# Altium PCB PCB_V2.PcbDoc
Units mm, origin at the board's own origin, x right, y up, seen from the top; angles counter-clockwise.
Board outline 25.02 x 109.47 mm, 2 copper layers (Top Layer, Bottom Layer); 26 components, 27 nets, 65 pads, 8 vias.
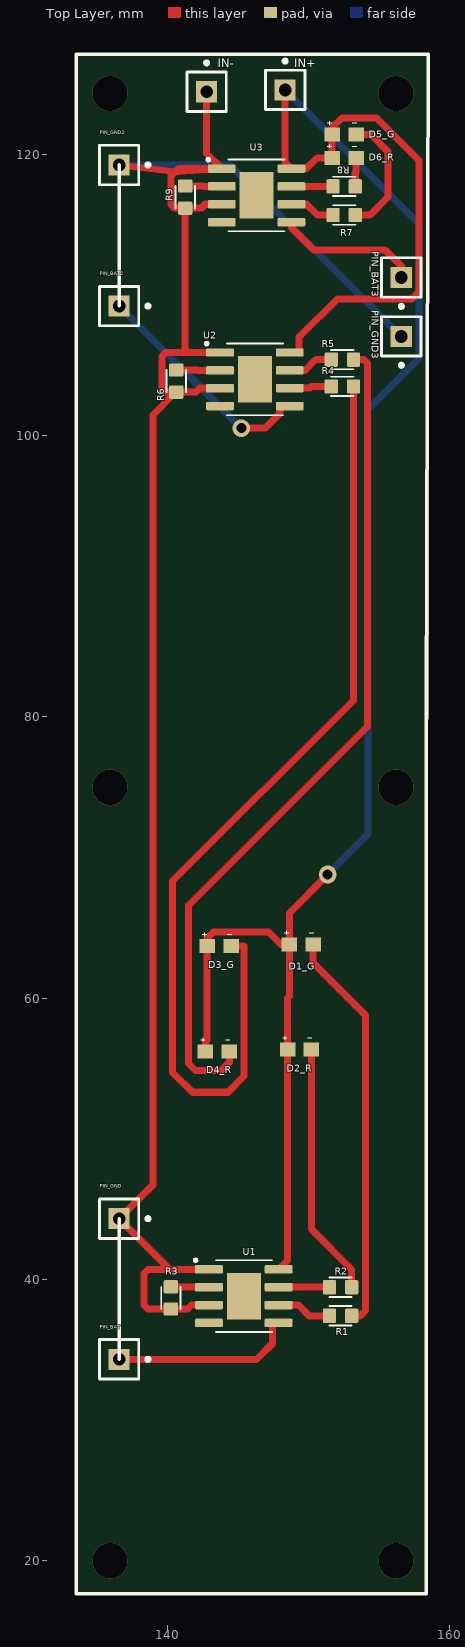
[diagram p0: Top Layer view]
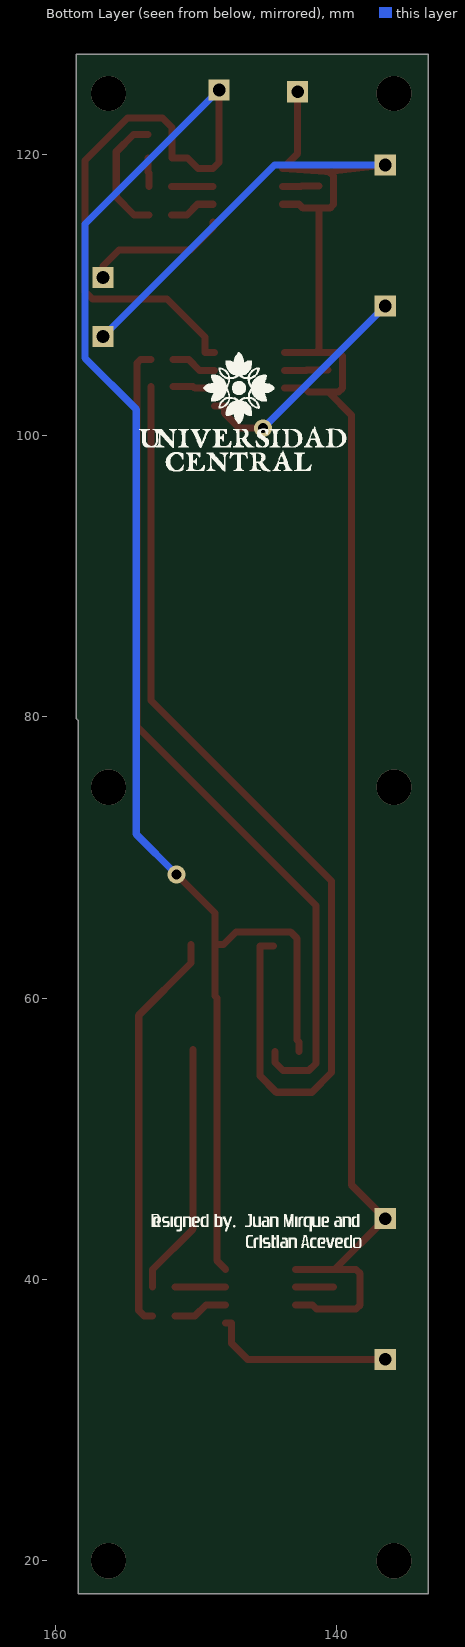
[diagram p1: Bottom Layer view, seen from below]
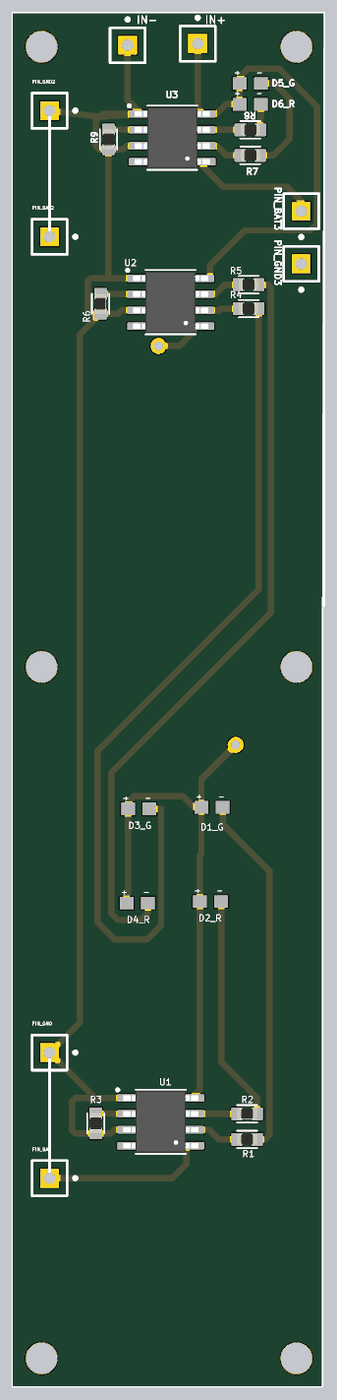
[diagram p2: 3D render of the assembled board from above, using the file's embedded part models]

## Layer stack, top to bottom
Top Solder: solder mask 0.0102, Solder Resist, Dk 3.5
Top Layer: signal copper 0.0356
Dielectric 1: dielectric 0.32, FR-4, Dk 4.8
Bottom Layer: signal copper 0.0356
Bottom Solder: solder mask 0.0102, Solder Resist, Dk 3.5

## Board outline
133.477,17.653 158.369,17.653 158.369,79.756 158.496,79.883 158.496,127.127 133.477,127.127 133.477,79.883

## Design rules (kind name [scope] priority, off if disabled: settings)
Clearance [All] p1: gap=0.254 ignorepadtopadclearanceinfootprint=FALSE except(0: Arc-Hole Track-Hole SMDPad-Hole THPad-Hole Via-Hole Fill-Hole Poly-Hole Region-Hole Text-Hole)
PolygonConnect [All] p1: connectstyle=Relief reliefconductorwidth=0.254 reliefentries=4 polygonreliefangle="90 Angle" airgapwidth=0.254
RoutingVias [All] p1: holewidth=0.711 width=1.27 viastyle="Through Hole" minholewidth=0.711 minwidth=1.27 maxholewidth=0.711 maxwidth=1.27
SolderMaskExpansion [All] p1: expansion=0.102 istentingtop=FALSE
Width [All] p1: maxlimit=0.5 minlimit=0.254 preferedwidth=0.5
30 further rules are at their usual default settings.

## Components (designator, comment, footprint, x,y, rotation, side; value= is the part's Value field where it differs from the comment)
D1_G "Green" 0603gree 149.479,63.834 r180 top
D2_R "Red" 0603red 149.352,56.341 r180 top
D3_G "Green" 0603gree 143.637,63.707 r180 top
D4_R "Red" 0603red 143.51,56.214 r180 top
D5_G "Green" 0603gree 152.527,121.412 r180 top
D6_R "Red" 0603red 152.527,119.761 r180 top
IN+ "Plug" PIN1 148.336,124.587 r0 top
IN- "Plug" PIN1 142.748,124.46 r0 top
PIN_BAT "Plug" PIN1 136.525,34.324 r270 top
PIN_BAT2 "Plug" PIN1 136.525,109.22 r270 top
PIN_BAT3 "Plug" PIN1 156.591,111.252 r180 top
PIN_GND "Plug" PIN1 136.525,44.324 r270 top
PIN_GND2 "Plug" PIN1 136.525,119.253 r270 top
PIN_GND3 "Plug" PIN1 156.591,107.061 r180 top
R1 "1k" RESC1608X50N 152.273,37.418 r0 top
R2 "1k" RESC1608X50N 152.273,39.45 r0 top
R3 "1k2" RESC1608X50N 140.208,38.688 r90 top
R4 "1k" RESC1608X50N 152.4,103.505 r0 top
R5 "1k" RESC1608X50N 152.4,105.41 r0 top
R6 "1k2" RESC1608X50N 140.589,103.886 r90 top
R7 "1k" RESC1608X50N 152.527,115.697 r0 top
R8 "1k" RESC1608X50N 152.527,117.729 r0 top
R9 "1k2" RESC1608X50N 141.224,116.967 r90 top
U1 "TP4056" SOP127P600X175-9N 145.391,38.817 r0 top
U2 "TP4056" SOP127P600X175-9N 146.177,104.013 r0 top
U3 "TP4056" SOP127P600X175-9N 146.304,117.094 r0 top

## Footprints (in the part's own frame and the unit in brackets; to place one, negate y for a bottom-side part, rotate by r counter-clockwise, add the part's x,y. Pads: shape width x height; smd on the part's side, far side on the other; paste and mask are expansions set on the pad)
0603gree [mm]
  rect 1.1x1 smd: 1(-0.85,0) 2(0.85,0)
  silkscreen extent -0.89,-0.97 1.19,-0.71, body extent -0.8,-0.4 0.8,0.4, height 0.4
0603red [mm]
  rect 1.1x1 smd: 1(-0.85,0) 2(0.85,0)
  silkscreen extent -0.89,-0.97 1.19,-0.71, body extent -0.8,-0.4 0.8,0.4, height 0.4
PIN1 [mm] "Connector; Plug"
  rect 1.5x1.5 hole 0.9: 1(0,0)
  silkscreen extent -1.4,-1.4 1.4,2.17
RESC1608X50N [mm]
  rrect20% 0.94x1.02 smd: 1(-0.79,0) 2(0.79,0)
  silkscreen extent -0.8,-0.69 0.8,0.69, body extent -0.78,-0.43 0.78,0.43, height 0.45
SOP127P600X175-9N [mm]
  rrect25% 1.97x0.6 smd: 1(-2.475,1.905) 2(-2.475,0.635) 3(-2.475,-0.635) 4(-2.475,-1.905) 5(2.475,-1.905) 6(2.475,-0.635) 7(2.475,0.635) 8(2.475,1.905)
  rect 2.413x3.302 smd paste-3: 9(0,0)
  silkscreen extent -3.53,-2.55 2,2.64, body extent -3,-2.45 3,2.45, height 1.75

## Part data
D1_G D2_R D3_G D4_R D5_G D6_R: library part LTST-C191KGKT, "Green 571nm LED Indication - Discrete 2V 0603 _1608 Metric_", Package="0603 Lite-On", Availability=Unavailable, MF="Lite-On Inc.", MP=LTST-C191KGKT, Price=None, SnapEDA_Link=https://www.snapeda.com/parts/LTST-C191KGKT/Lite-On%20Inc./view-part/48565/?ref=snap
R1 R2 R3 R4 R5 R6 R7 R8 R9: library part RP73D1J13RBTDG, "Res, Thin Film, 13r, 0.1%, 0.1w, 0603", Package="0603 TE Connectivity / AMP", Availability=Unavailable, MF="TE Connectivity", MP=RP73D1J13RBTDG, Price=None, SnapEDA_Link=https://www.snapeda.com/parts/RP73D1J13RBTDG/TE%20Connectivity/view-part/970906/?ref=snap, TE_purchase_URL=https://www.te.com/usa-en/product-RP73D1J13RBTDG.html?te_bu=Cor&te_type=disp&te_campaign=seda_glo_cor-seda-global-disp-prtnr-fy19-seda-model-bom-cta_sma-317_1&elqCampaignId=32493
U1 U2 U3: "Complete single cell Li-Ion battery with a constant current / constant voltage linear charger", Package=Package, Availability="No availability data", Check_prices=https://www.snapeda.com/parts/TP4056%20/NanJing%20Top%20Power%20ASIC%20Corp./view-part/2888426/?ref=eda, MF="NanJing Top Power ASIC Corp.", MP=TP4056, Price=None, SnapEDA_Link=https://www.snapeda.com/parts/TP4056%20/NanJing%20Top%20Power%20ASIC%20Corp./view-part/2888426/?ref=snap
IN+ IN- PIN_BAT PIN_BAT2 PIN_BAT3 PIN_GND PIN_GND2 PIN_GND3: LatestRevisionDate=17-Jul-2002, LatestRevisionNote="Re-released for DXP Platform.", Publisher="Altium Limited"

## Via types
v1: diameter 2.5, hole 2.5, Top Layer to Bottom Layer, 6 vias
v2: diameter 1.27, hole 0.711, Top Layer to Bottom Layer, 2 vias

## Nets (pads, with @x,y where several pads share a name; then routed paths per layer and width w, separated by ;. In a path a pad name is that pad's centre, name@x,y a point inside that pad or via, vN(x,y) a via of type N, cw(c..) or ccw(c..) an arc to the next point about the centre after c; other vN are vias at no path point)
GND: IN-.1 PIN_GND2.1 PIN_GND3.1 PIN_GND.1 R3.1 R6.1 R9.1 U1.1 U1.3 U2.1 U2.3 U3.1 U3.3 | length 146.7
  Top Layer w0.5: PIN_GND2.1 140.513,118.77 ; R6.1@140.549,103.096 138.938,101.485 138.938,46.737 PIN_GND.1 140.127,40.722 ; IN-.1 142.748,120.08 U3.1 ; U1.3 141.685,38.182 141.402,37.898 R3.1 138.596,37.898 138.303,38.191 138.303,40.429 138.596,40.722 140.127,40.722 ; U1.1 140.127,40.722 ; U2.3 142.268,103.378 141.986,103.096 R6.1 140.329,103.096 139.855,103.096 139.573,103.378 139.573,105.664 139.827,105.918 141.224,105.918 141.427,105.918 ; U2.1 141.427,105.918 ; U3.3 142.649,116.459 142.367,116.177 R9.1 ; 140.513,118.77 140.756,118.787 U3.1 ; 140.513,118.77 140.741,118.999 U3.1 ; 140.513,118.77 140.208,118.466 140.208,116.431 140.462,116.177 R9.1 ; R9.1 141.224,106.121 141.427,105.918
  Bottom Layer w0.5: PIN_GND2.1 144.399,119.253 PIN_GND3.1
NetC1_1: 
NetC1_2: 
NetC2_1: 
NetD1_G_1: D1_G.1 R1.2 | length 28.7
  Top Layer w0.5: D1_G.1 150.329,62.509 154.051,58.787 154.051,37.799 153.67,37.418 R1.2
NetD1_G_2: D1_G.2 D2_R.2 D3_G.2 D4_R.2 D5_G.2 D6_R.2 IN+.1 U1.8 U2.8 U3.8 | length 146.3
  Top Layer w0.5: D4_R.2 142.66,56.896 142.787,57.023 D3_G.2 142.787,64.262 143.244,64.719 147.142,64.719 148.027,63.834 D1_G.2 ; U1.8 148.502,41.357 D2_R.2 148.502,60.02 148.629,60.147 D1_G.2 ; IN+.1 148.336,119.442 U3.8 149.835,118.999 150.597,119.761 D6_R.2 D5_G.2 151.677,121.92 152.363,122.606 154.838,122.606 157.861,119.583 157.861,110.236 157.353,109.728 152.044,109.728 149.327,107.01 149.327,105.918 U2.8 ; v2(151.359,68.795) 148.629,66.065 D1_G.2
  Bottom Layer w0.5: IN+.1 157.861,115.062 157.861,105.512 154.229,101.879 154.229,71.665 v2(151.359,68.795)
NetD2_R_1: D2_R.1 R2.2 | length 18.1
  Top Layer w0.5: D2_R.1 150.202,43.575 153.063,40.714 R2.2
NetD3_G_1: D3_G.1 R4.2 | length 70.4
  Top Layer w0.5: D3_G.1 145.415,63.707 145.415,54.458 144.272,53.315 141.74,53.315 140.335,54.72 140.335,68.326 153.19,81.181 R4.2
NetD4_R_1: D4_R.1 R5.2 | length 60.3
  Top Layer w0.5: D4_R.1 144.36,55.435 143.789,54.864 141.961,54.864 141.453,55.372 141.453,66.599 154.178,79.324 154.178,105.156 153.924,105.41 R5.2
NetD5_G_1: D5_G.1 R7.2 | length 8.9
  Top Layer w0.5: R7.2 154.381,115.697 155.651,116.967 155.651,120.193 154.432,121.412 D5_G.1
NetD6_R_1: D6_R.1 R8.2 | length 2.1
  Top Layer w0.5: R8.2 153.317,118.694 153.377,118.754 D6_R.1
NetIC1_1: 
NetIC1_2: 
NetIC1_3: 
NetPIN_BAT2_1: PIN_BAT2.1 U2.5 | length 16.7
  Top Layer w0.5: v2(145.212,100.533) 146.888,100.533 147.955,101.6 147.955,102.108 U2.5
  Bottom Layer w0.5: PIN_BAT2.1 v2(145.212,100.533)
NetPIN_BAT3_1: PIN_BAT3.1 U3.5 | length 10.2
  Top Layer w0.5: U3.5 148.768,115.189 148.768,114.808 150.368,113.208 155.448,113.208 156.591,112.065 PIN_BAT3.1
NetPIN_BAT_1: PIN_BAT.1 U1.5 | length 13.3
  Top Layer w0.5: PIN_BAT.1 146.304,34.324 147.447,35.467 147.447,36.912 U1.5
NetQ1_1: 
NetR1_1: R1.1 U1.6 | length 3.9
  Top Layer w0.5: U1.6 149.276,38.182 150.039,37.418 R1.1
NetR2_1: R2.1 U1.7 | length 3.6
  Top Layer w0.5: U1.7 149.657,39.452 149.658,39.45 R2.1
NetR3_2: R3.2 U1.2 | length 2.7
  Top Layer w0.5: R3.2 141.529,39.478 141.555,39.452 U1.2
NetR4_1: R4.1 U2.6 | length 3
  Top Layer w0.5: U2.6 150.063,103.378 150.19,103.505 R4.1
NetR5_1: R5.1 U2.7 | length 3.3
  Top Layer w0.5: U2.7 149.733,104.648 150.495,105.41 R5.1
NetR6_2: R6.2 U2.2 | length 3.1
  Top Layer w0.5: R6.2 142.113,104.676 142.141,104.648 U2.2
NetR7_1: R7.1 U3.6 | length 3.3
  Top Layer w0.5: U3.6 149.86,116.459 150.622,115.697 R7.1
NetR8_1: R8.1 U3.7 | length 3
  Top Layer w0.5: U3.7 R8.1
NetR9_2: R9.2 U3.2 | length 2.6
  Top Layer w0.5: R9.2 142.494,117.757 142.522,117.729 U3.2
pads on no net: U1.4 U1.9 U2.4 U2.9 U3.4 U3.9
copper on no net:
  other v1: 135.89,20 156.21,20 135.89,75 156.21,75 135.89,124.333 156.21,124.333

## Silkscreen, mask and mechanical layers (free items; w line width, h text height)
Top Overlay:
  lines w0.254: 136.525,34.324 136.525,44.324 ; 136.525,109.253 136.525,119.253 ; 158.369,79.756 158.369,17.653 133.477,17.653 133.477,79.883 133.477,127.127 158.496,127.127 158.369,79.883
Bottom Overlay:
  drawing of 61 lines, arcs and shapes, not listed